# Altium PCB VE_Test_MEA_Solid.PcbDoc
Units mm, origin at the board's own origin, x right, y up, seen from the top; angles counter-clockwise.
Board outline 49 x 49 mm, 4 copper layers (Top Copper Layer, Internal Copper Layer 1, Internal Copper Layer 2, Bottom Copper Layer), stack 1.58 mm thick; 1 components, 1 nets, 120 pads, 0 vias.
Unrouted connection lines stored in the file: 59.
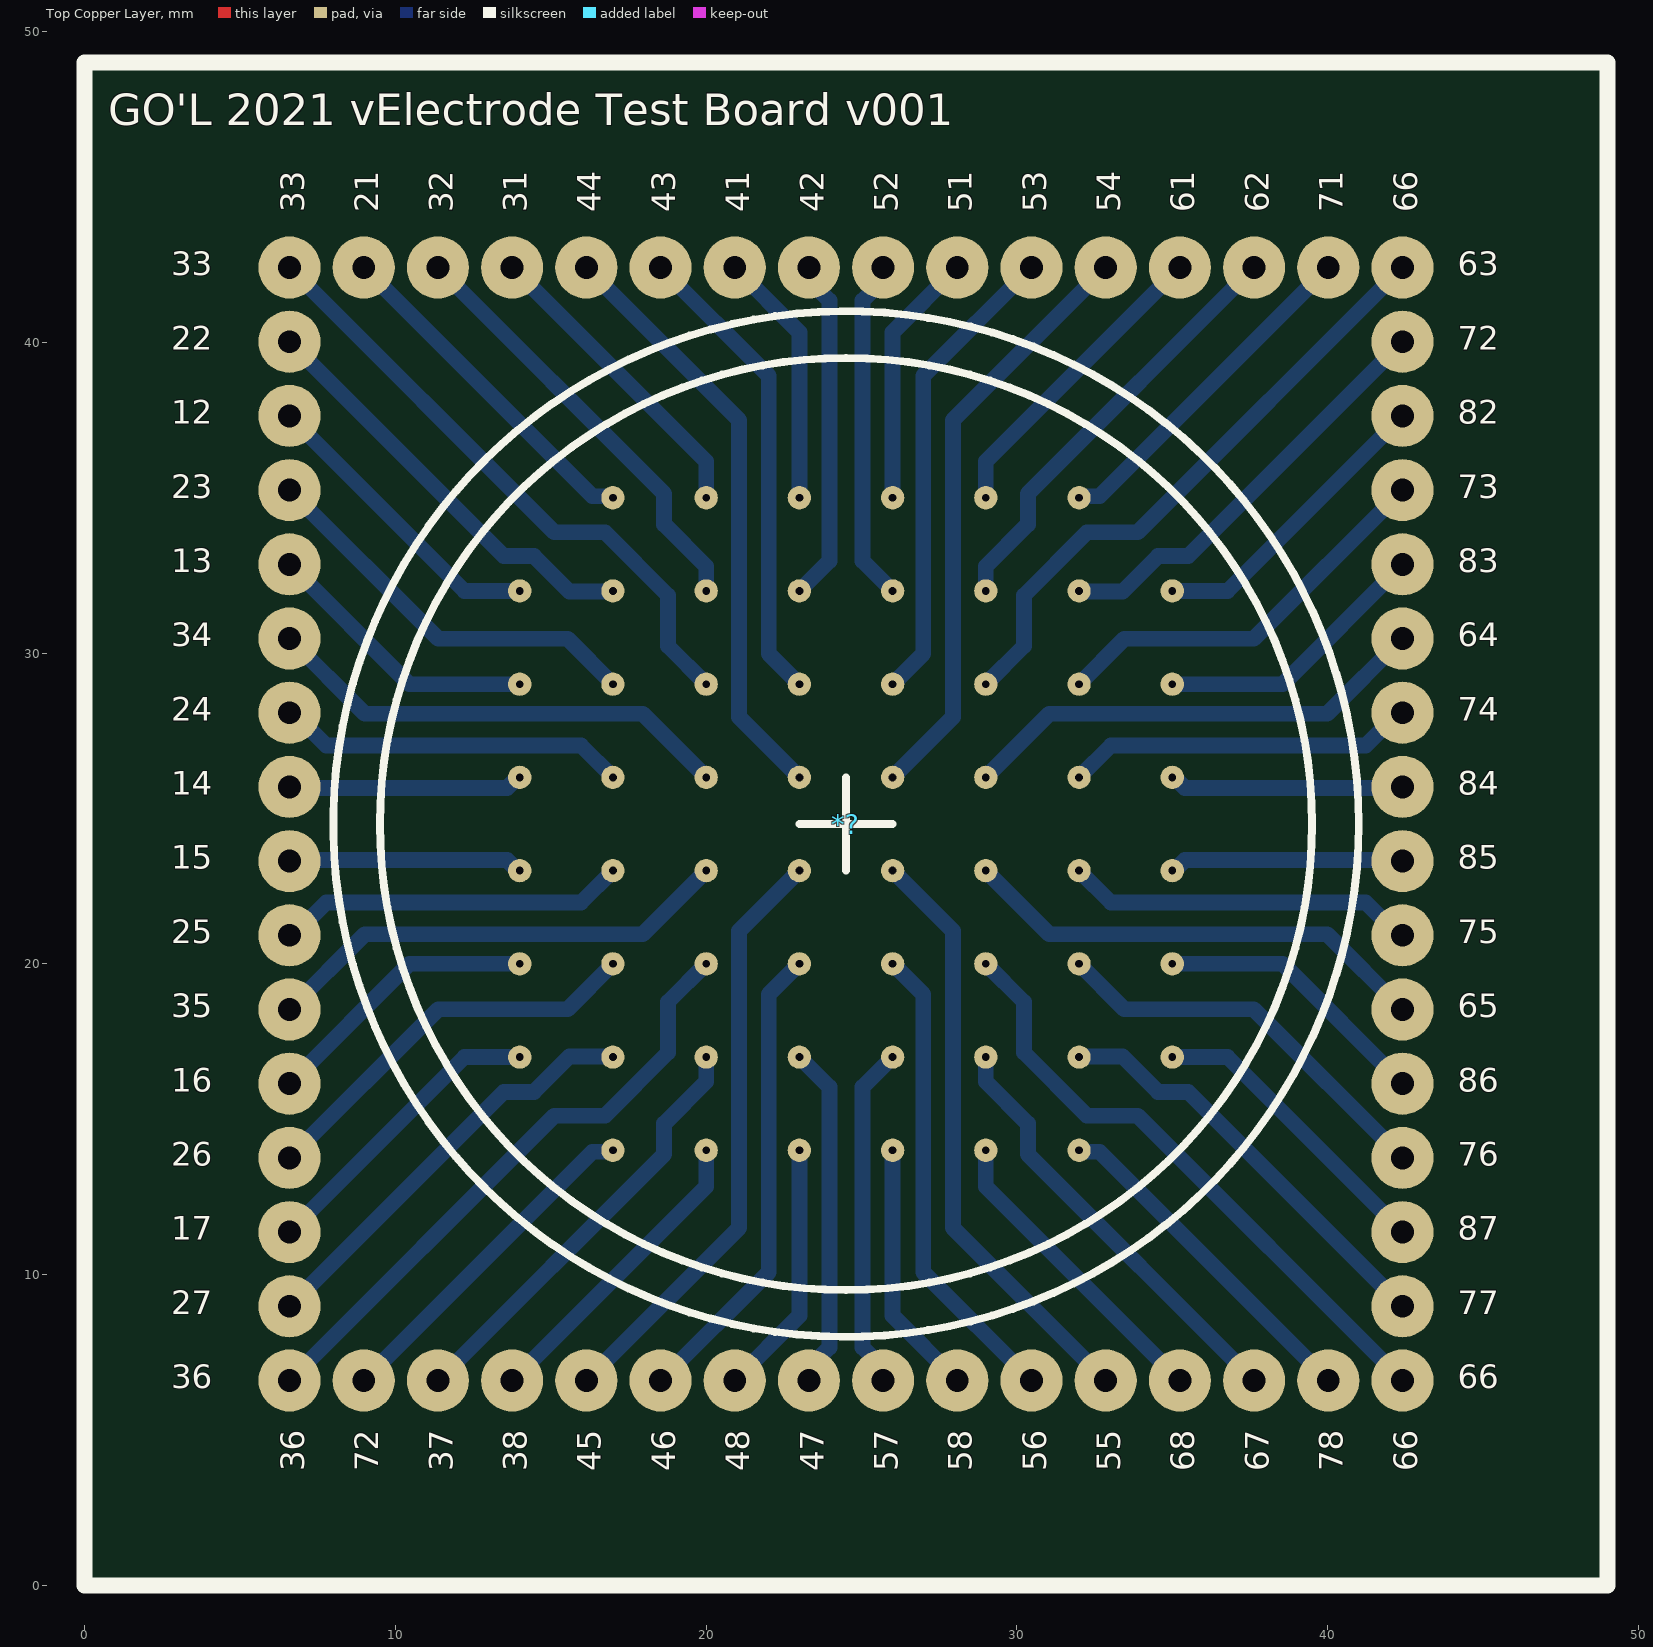
[diagram p0: Top Copper Layer view]
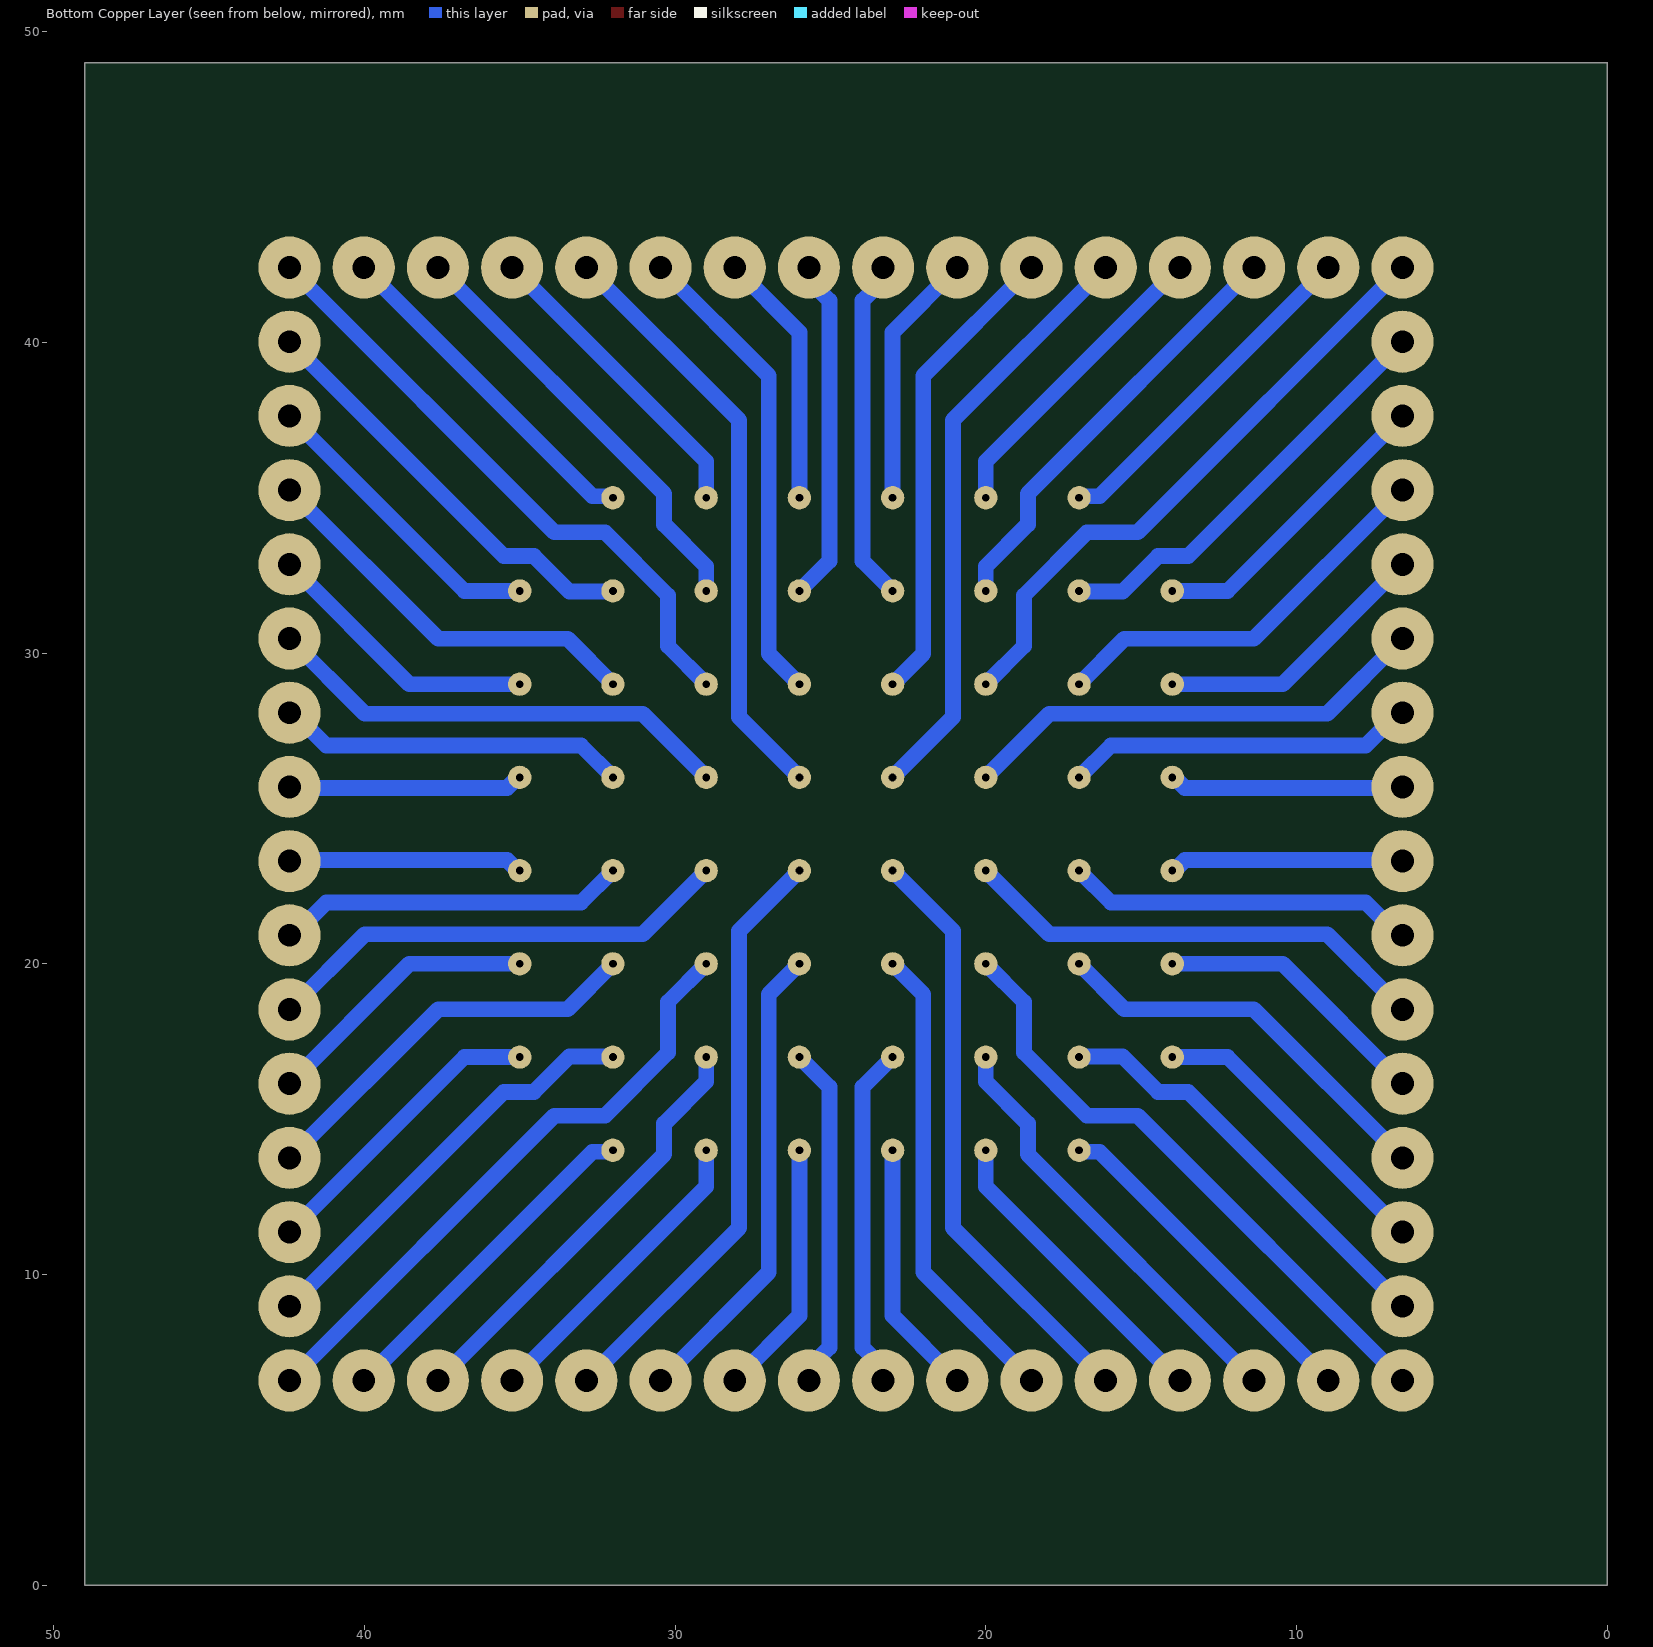
[diagram p1: Bottom Copper Layer view, seen from below]

## Layer stack, top to bottom
Top Solder: solder mask 0.01, Solder Resist, Dk 3.5
Top Copper Layer: signal copper 0.035
Dielectric 1: prepreg 0.22, FR-4, Dk 4.2
Internal Copper Layer 1: signal copper 0.035
Dielectric 2: core 1, FR-4, Dk 4.2
Internal Copper Layer 2: signal copper 0.035
Dielectric 3: prepreg 0.22, FR-4, Dk 4.2
Bottom Copper Layer: signal copper 0.035
Bottom Solder: solder mask 0.01, Solder Resist, Dk 3.5

## Board outline
0,0 49,0 49,49 0,49

## Design rules (kind name [scope] priority, off if disabled: settings)
BoardOutlineClearance [All] p1: gap=0.4 ignorepadtopadclearanceinfootprint=FALSE
Clearance [All] p1: gap=0.102 ignorepadtopadclearanceinfootprint=TRUE
ComponentClearance [All] p1: gap=0.15 collisioncheckmode=3 verticalgap=0.15 showdistances=FALSE
HoleSize [All] p1: absolutevalues=TRUE maxlimit=0.4 minlimit=0.25 maxpercent=80.000 minpercent=20.000
HoleToHoleClearance [All] p1: gap=0.45 allowstackedmicrovias=TRUE
MinimumAnnularRing [All] p1: minimumring=0.15
MinimumSolderMaskSliver [All] p1: minsoldermaskwidth=0.15
PlaneClearance [All] p1: clearance=0.15
PlaneConnect [All] p1: planeconnectstyle=Relief reliefexpansion=0.25 reliefentries=4 reliefconductorwidth=0.15 reliefairgap=0.15
PolygonConnect [All] p1: connectstyle=Direct reliefconductorwidth=0.15 reliefentries=4 polygonreliefangle="90 Angle" airgapwidth=0.15
RoomDefinition VE_Test_MEA_Solid [InComponentClass('VE_Test_MEA_Solid')] p1 off: confinementstyle=ConfineIn formatcopy=TRUE lockcomponents=FALSE outline 0,0 50.8,0 50.8,25.4 0,25.4
RoutingVias [All] p1: holewidth=0.25 width=0.55 viastyle="Through Hole" minholewidth=0.25 minwidth=0.55 maxholewidth=0.4 maxwidth=0.8
SilkToSilkClearance [All] p1: silktosilkclearance=0.2
SilkToSolderMaskClearance [IsPad] p1: minsilkscreentomaskgap=0.2 clearancetoexposedcopper=TRUE
SolderMaskExpansion [All] p1: expansion=0.15 istentingtop=FALSE
Width [All] p1: maxlimit=50 minlimit=0.15 preferedwidth=0.203
22 further rules are at their usual default settings.

## Components (designator, comment, footprint, x,y, rotation, side; value= is the part's Value field where it differs from the comment)
*? "POGO_PINS" MCS_MEA_VE_TEST_3MM 24.5,24.5 r0 top locked

## Footprints (in the part's own frame and the unit in brackets; to place one, negate y for a bottom-side part, rotate by r counter-clockwise, add the part's x,y. Pads: shape width x height; smd on the part's side, far side on the other; paste and mask are expansions set on the pad)
MCS_MEA_VE_TEST_3MM [mm]
  round 2 hole 0.737 mask+0.15: 12(-17.907,13.132) 13(-17.907,8.357) 14(-17.907,1.194) 15(-17.907,-1.194) 16(-17.907,-8.357) 17(-17.907,-13.132) 21(-15.519,17.907) 22(-17.907,15.519) 23(-17.907,10.744) 24(-17.907,3.581) 25(-17.907,-3.581) 26(-17.907,-10.744) 27(-17.907,-15.519) 28(-15.519,-17.907) 31(-10.744,17.907) 32(-13.132,17.907) 33(-17.907,17.907) 34(-17.907,5.969) 35(-17.907,-5.969) 36(-17.907,-17.907) 37(-13.132,-17.907) 38(-10.744,-17.907) 41(-3.581,17.907) 42(-1.194,17.907) 43(-5.969,17.907) 44(-8.357,17.907) 45(-8.357,-17.907) 46(-5.969,-17.907) 47(-1.194,-17.907) 48(-3.581,-17.907) 51(3.581,17.907) 52(1.194,17.907) 53(5.969,17.907) 54(8.357,17.907) 55(8.357,-17.907) 56(5.969,-17.907) 57(1.194,-17.907) 58(3.581,-17.907) 61(10.744,17.907) 62(13.132,17.907) 63(17.907,17.907) 64(17.907,5.969) 65(17.907,-5.969) 66(17.907,-17.907) 67(13.132,-17.907) 68(10.744,-17.907) 71(15.519,17.907) 72(17.907,15.519) 73(17.907,10.744) 74(17.907,3.581) 75(17.907,-3.581) 76(17.907,-10.744) 77(17.907,-15.519) 78(15.519,-17.907) 82(17.907,13.132) 83(17.907,8.357) 84(17.907,1.194) 85(17.907,-1.194) 86(17.907,-8.357) 87(17.907,-13.132)
  round 0.75 hole 0.25 mask+0: 12(-10.5,7.5) 13(-10.5,4.5) 14(-10.5,1.5) 15(-10.5,-1.5) 16(-10.5,-4.5) 17(-10.5,-7.5) 21(-7.5,10.5) 22(-7.5,7.5) 23(-7.5,4.5) 24(-7.5,1.5) 25(-7.5,-1.5) 26(-7.5,-4.5) 27(-7.5,-7.5) 28(-7.5,-10.5) 31(-4.5,10.5) 32(-4.5,7.5) 33(-4.5,4.5) 34(-4.5,1.5) 35(-4.5,-1.5) 36(-4.5,-4.5) 37(-4.5,-7.5) 38(-4.5,-10.5) 41(-1.5,10.5) 42(-1.5,7.5) 43(-1.5,4.5) 44(-1.5,1.5) 45(-1.5,-1.5) 46(-1.5,-4.5) 47(-1.5,-7.5) 48(-1.5,-10.5) 51(1.5,10.5) 52(1.5,7.5) 53(1.5,4.5) 54(1.5,1.5) 55(1.5,-1.5) 56(1.5,-4.5) 57(1.5,-7.5) 58(1.5,-10.5) 61(4.5,10.5) 62(4.5,7.5) 63(4.5,4.5) 64(4.5,1.5) 65(4.5,-1.5) 66(4.5,-4.5) 67(4.5,-7.5) 68(4.5,-10.5) 71(7.5,10.5) 72(7.5,7.5) 73(7.5,4.5) 74(7.5,1.5) 75(7.5,-1.5) 76(7.5,-4.5) 77(7.5,-7.5) 78(7.5,-10.5) 82(10.5,7.5) 83(10.5,4.5) 84(10.5,1.5) 85(10.5,-1.5) 86(10.5,-4.5) 87(10.5,-7.5)
  silkscreen extent -24.5,-24.5 24.5,24.5

## Nets (pads, with @x,y where several pads share a name; then routed paths per layer and width w, separated by ;. In a path a pad name is that pad's centre, name@x,y a point inside that pad or via, vN(x,y) a via of type N, cw(c..) or ccw(c..) an arc to the next point about the centre after c; other vN are vias at no path point)
Net*?_12: *?.12 *?.13 *?.14 *?.15 *?.16 *?.17 *?.21 *?.22 *?.23 *?.24 *?.25 *?.26 *?.27 *?.28 *?.31 *?.32 *?.33 *?.34 *?.35 *?.36 *?.37 *?.38 *?.41 *?.42 *?.43 *?.44 *?.45 *?.46 *?.47 *?.48 *?.51 *?.52 *?.53 *?.54 *?.55 *?.56 *?.57 *?.58 *?.61 *?.62 *?.63 *?.64 *?.65 *?.66 *?.67 *?.68 *?.71 *?.72 *?.73 *?.74 *?.75 *?.76 *?.77 *?.78 *?.82 *?.83 *?.84 *?.85 *?.86 *?.87 | length 753.6
  Bottom Copper Layer w0.508: *?.36@6.593,6.593 15.113,15.113 16.742,15.113 18.774,17.145 18.774,18.774 *?.36@20,20 ; *?.27@6.593,8.981 13.487,15.875 14.456,15.875 15.599,17.018 16.982,17.018 *?.27@17,17 ; *?.17@6.593,11.368 12.225,17 *?.17@14,17 ; *?.26@6.593,13.756 11.379,18.542 15.542,18.542 *?.26@17,20 ; *?.16@6.593,16.143 10.45,20 *?.16@14,20 ; *?.35@6.593,18.531 9.017,20.955 17.955,20.955 *?.35@20,23 ; *?.25@6.593,20.919 6.726,20.919 7.778,21.971 15.971,21.971 *?.25@17,23 ; *?.15@6.593,23.306 6.624,23.337 13.597,23.337 13.935,23 *?.15@14,23 ; *?.14@6.593,25.694 6.624,25.663 13.597,25.663 13.935,26 *?.14@14,26 ; *?.24@6.593,28.081 6.726,28.081 7.778,27.029 15.971,27.029 *?.24@17,26 ; *?.34@6.593,30.469 9.017,28.045 17.955,28.045 *?.34@20,26 ; *?.13@6.593,32.857 10.45,29 *?.13@14,29 ; *?.23@6.593,35.244 11.379,30.458 15.542,30.458 *?.23@17,29 ; *?.12@6.593,37.632 12.225,32 *?.12@14,32 ; *?.22@6.593,40.019 13.487,33.125 14.456,33.125 15.599,31.982 16.982,31.982 *?.22@17,32 ; *?.33@6.593,42.407 15.113,33.887 16.742,33.887 18.774,31.855 18.774,30.226 *?.33@20,29 ; *?.28@8.981,6.593 16.341,13.954 16.954,13.954 *?.28@17,14 ; *?.21@8.981,42.407 16.341,35.046 16.954,35.046 *?.21@17,35 ; *?.37@11.368,6.593 18.647,13.872 18.647,14.859 20,16.212 *?.37@20,17 ; *?.32@11.368,42.407 18.647,35.128 18.647,34.141 20,32.788 *?.32@20,32 ; *?.38@13.756,6.593 20,12.837 *?.38@20,14 ; *?.31@13.756,42.407 20,36.163 *?.31@20,35 ; *?.45@16.143,6.593 21.06,11.51 21.06,21.06 *?.45@23,23 ; *?.44@16.143,42.407 21.06,37.49 21.06,27.94 *?.44@23,26 ; *?.46@18.531,6.593 22.018,10.08 22.018,19.018 *?.46@23,20 ; *?.43@18.531,42.407 22.018,38.92 22.018,29.982 *?.43@23,29 ; *?.48@20.919,6.593 23,8.674 *?.48@23,14 ; *?.41@20.919,42.407 23,40.326 *?.41@23,35 ; *?.47@23,17 23.967,16.033 23.967,7.658 23.306,6.997 *?.47@23.306,6.593 ; *?.42@23,32 23.967,32.967 23.967,41.342 23.306,42.003 *?.42@23.306,42.407 ; *?.57@25.694,6.593 25.694,6.997 25.033,7.658 25.033,16.033 *?.57@26,17 ; *?.52@25.694,42.407 25.694,42.003 25.033,41.342 25.033,32.967 *?.52@26,32 ; *?.58@26,14 26,8.674 *?.58@28.081,6.593 ; *?.56@26,20 26.982,19.018 26.982,10.08 *?.56@30.469,6.593 ; *?.55@26,23 27.94,21.06 27.94,11.51 *?.55@32.857,6.593 ; *?.54@26,26 27.94,27.94 27.94,37.49 *?.54@32.857,42.407 ; *?.53@26,29 26.982,29.982 26.982,38.92 *?.53@30.469,42.407 ; *?.51@26,35 26,40.326 *?.51@28.081,42.407 ; *?.68@29,14 29,12.837 *?.68@35.244,6.593 ; *?.67@29,17 29,16.212 30.353,14.859 30.353,13.872 *?.67@37.632,6.593 ; *?.66@29,20 30.226,18.774 30.226,17.145 32.258,15.113 33.887,15.113 *?.66@42.407,6.593 ; *?.65@29,23 31.045,20.955 39.983,20.955 *?.65@42.407,18.531 ; *?.64@29,26 31.045,28.045 39.983,28.045 *?.64@42.407,30.469 ; *?.63@29,29 30.226,30.226 30.226,31.855 32.258,33.887 33.887,33.887 *?.63@42.407,42.407 ; *?.62@29,32 29,32.788 30.353,34.141 30.353,35.128 *?.62@37.632,42.407 ; *?.61@29,35 29,36.163 *?.61@35.244,42.407 ; *?.78@32,14 32.046,13.954 32.659,13.954 *?.78@40.019,6.593 ; *?.77@32,17 32.018,17.018 33.401,17.018 34.544,15.875 35.513,15.875 *?.77@42.407,8.981 ; *?.76@32,20 33.458,18.542 37.621,18.542 *?.76@42.407,13.756 ; *?.75@32,23 33.029,21.971 41.222,21.971 42.274,20.919 *?.75@42.407,20.919 ; *?.74@32,26 33.029,27.029 41.222,27.029 42.274,28.081 *?.74@42.407,28.081 ; *?.73@32,29 33.458,30.458 37.621,30.458 *?.73@42.407,35.244 ; *?.72@32,32 32.018,31.982 33.401,31.982 34.544,33.125 35.513,33.125 *?.72@42.407,40.019 ; *?.71@32,35 32.046,35.046 32.659,35.046 *?.71@40.019,42.407 ; *?.87@35,17 36.775,17 *?.87@42.407,11.368 ; *?.86@35,20 38.55,20 *?.86@42.407,16.143 ; *?.85@35,23 35.065,23 35.403,23.337 42.376,23.337 *?.85@42.407,23.306 ; *?.84@35,26 35.065,26 35.403,25.663 42.376,25.663 *?.84@42.407,25.694 ; *?.83@35,29 38.55,29 *?.83@42.407,32.857 ; *?.82@35,32 36.775,32 *?.82@42.407,37.632

## Silkscreen, mask and mechanical layers (free items; w line width, h text height)
Top Overlay:
  circle w0.254: c24.5,24.5 r16.5
  circle w0.254: c24.5,24.5 r15
  lines w0.254: 23,24.5 26,24.5 23,24.5 ; 24.5,23 24.5,26 24.5,23
  lines w0.508: 0,0 0,49 ; 0,0 49,0 ; 0,0 49,0 ; 0,0 0,49 ; 0,49 49,49 ; 0,49 49,49 ; 49,0 49,49 ; 49,0 49,49
  text "GO'L 2021 vElectrode Test Board v001" at 0.762,46.99 h1.02

## Text inside footprints (layer, text, board x,y; h text height)
*?: Top Overlay "33" at 2.783,42.153 h0.76; Top Overlay "22" at 2.783,39.765 h0.76; Top Overlay "12" at 2.783,37.378 h0.76; Top Overlay "23" at 2.783,34.99 h0.76; Top Overlay "13" at 2.783,32.603 h0.76; Top Overlay "34" at 2.783,30.215 h0.76; Top Overlay "24" at 2.783,27.827 h0.76; Top Overlay "14" at 2.783,25.44 h0.76; Top Overlay "15" at 2.783,23.052 h0.76; Top Overlay "25" at 2.783,20.665 h0.76; Top Overlay "35" at 2.783,18.277 h0.76; Top Overlay "16" at 2.783,15.889 h0.76; Top Overlay "26" at 2.783,13.502 h0.76; Top Overlay "17" at 2.783,11.114 h0.76; Top Overlay "27" at 2.783,8.727 h0.76; Top Overlay "36" at 2.783,6.339 h0.76; Top Overlay "63" at 44.185,42.153 h0.76; Top Overlay "72" at 44.185,39.765 h0.76; Top Overlay "82" at 44.185,37.378 h0.76; Top Overlay "73" at 44.185,34.99 h0.76; Top Overlay "83" at 44.185,32.603 h0.76; Top Overlay "64" at 44.185,30.215 h0.76; Top Overlay "74" at 44.185,27.827 h0.76; Top Overlay "84" at 44.185,25.44 h0.76; Top Overlay "85" at 44.185,23.052 h0.76; Top Overlay "75" at 44.185,20.665 h0.76; Top Overlay "65" at 44.185,18.277 h0.76; Top Overlay "86" at 44.185,15.889 h0.76; Top Overlay "76" at 44.185,13.502 h0.76; Top Overlay "87" at 44.185,11.114 h0.76; Top Overlay "77" at 44.185,8.727 h0.76; Top Overlay "66" at 44.185,6.339 h0.76; Top Overlay "36" at 7.063,3.668 h0.76 r90; Top Overlay "72" at 9.45,3.668 h0.76 r90; Top Overlay "37" at 11.838,3.668 h0.76 r90; Top Overlay "38" at 14.226,3.668 h0.76 r90; Top Overlay "45" at 16.613,3.668 h0.76 r90; Top Overlay "46" at 19.001,3.668 h0.76 r90; Top Overlay "48" at 21.388,3.668 h0.76 r90; Top Overlay "47" at 23.776,3.668 h0.76 r90; Top Overlay "57" at 26.164,3.668 h0.76 r90; Top Overlay "58" at 28.551,3.668 h0.76 r90; Top Overlay "56" at 30.939,3.668 h0.76 r90; Top Overlay "55" at 33.326,3.668 h0.76 r90; Top Overlay "68" at 35.714,3.668 h0.76 r90; Top Overlay "67" at 38.102,3.668 h0.76 r90; Top Overlay "78" at 40.489,3.668 h0.76 r90; Top Overlay "66" at 42.877,3.668 h0.76 r90; Top Overlay "33" at 7.063,44.181 h0.76 r90; Top Overlay "21" at 9.45,44.181 h0.76 r90; Top Overlay "32" at 11.838,44.181 h0.76 r90; Top Overlay "31" at 14.226,44.181 h0.76 r90; Top Overlay "44" at 16.613,44.181 h0.76 r90; Top Overlay "43" at 19.001,44.181 h0.76 r90; Top Overlay "41" at 21.388,44.181 h0.76 r90; Top Overlay "42" at 23.776,44.181 h0.76 r90; Top Overlay "52" at 26.164,44.181 h0.76 r90; Top Overlay "51" at 28.551,44.181 h0.76 r90; Top Overlay "53" at 30.939,44.181 h0.76 r90; Top Overlay "54" at 33.326,44.181 h0.76 r90; Top Overlay "61" at 35.714,44.181 h0.76 r90; Top Overlay "62" at 38.102,44.181 h0.76 r90; Top Overlay "71" at 40.489,44.181 h0.76 r90; Top Overlay "66" at 42.877,44.181 h0.76 r90